# EAGLE board ROUTED_POUR (EAGLE 9.2.2)
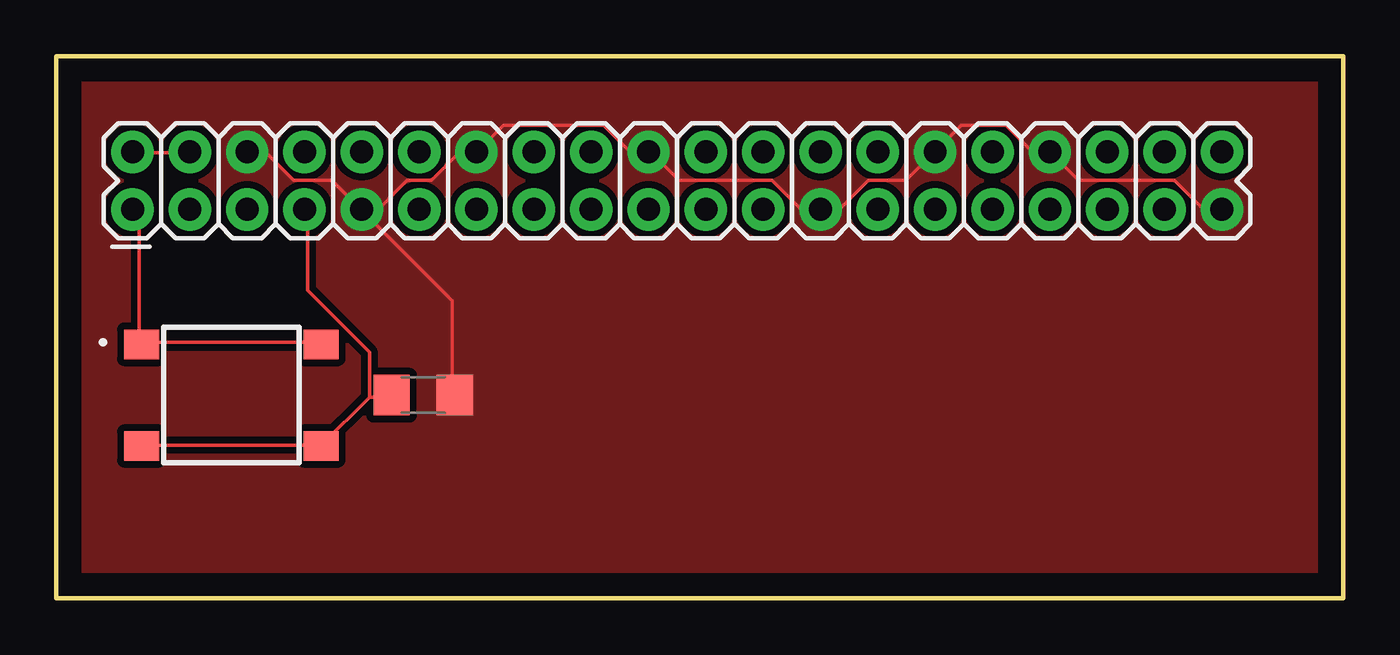
[diagram p0: board, top side]
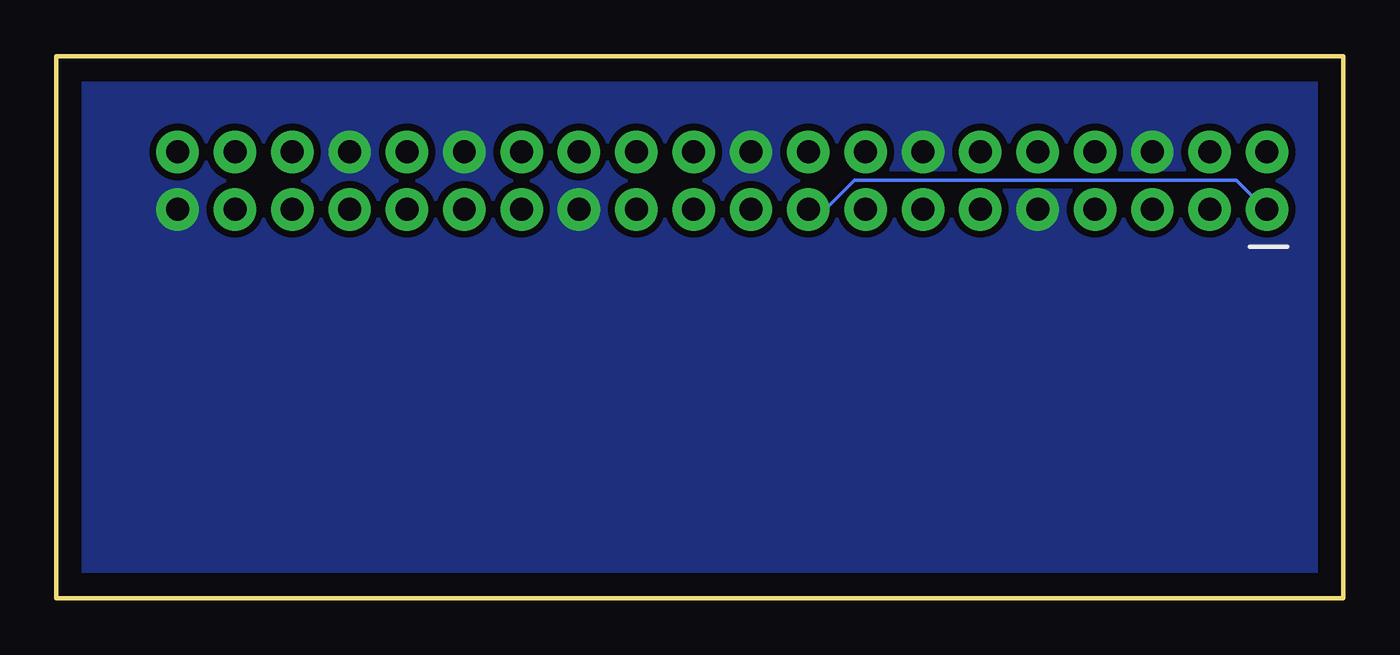
[diagram p1: board, bottom side, seen from below]

Size 57 x 24 mm. Coordinates in mm from the lower left corner, seen from the top.
Outline: 0,0 57,0 57,24 0,24 0,0
Copper layers (1*16): Top 0.035mm / dielectric 0.15mm / Bottom 0.035mm
Design rules "default": minimum track width 6mil, minimum drill 0.35mm, track to track 6mil, track to pad 6mil, pad to pad 6mil, via to via 6mil, smd to smd 6mil, copper to edge 40mil, drill to drill 6mil, minimum pad ring 10mil, minimum via ring 8mil, stop-mask expansion 4mil, vias tented up to drill 0mil, thermal gap 10mil

## Footprints (pad centres in the part's own frame; a part is rotated, then mirrored left to right if it is on the bottom)
CONNECTOR_RASPBERRYPI_SPARKFUN-CONNECTORS_2X20 = drill 1.016 pad 1.88: 1 -24.13,-1.27; 2 -24.13,1.27; 3 -21.59,-1.27; 4 -21.59,1.27; 5 -19.05,-1.27; 6 -19.05,1.27; 7 -16.51,-1.27; 8 -16.51,1.27; 9 -13.97,-1.27; 10 -13.97,1.27; 11 -11.43,-1.27; 12 -11.43,1.27; 13 -8.89,-1.27; 14 -8.89,1.27; 15 -6.35,-1.27; 16 -6.35,1.27; 17 -3.81,-1.27; 18 -3.81,1.27; 19 -1.27,-1.27; 20 -1.27,1.27; 21 1.27,-1.27; 22 1.27,1.27; 23 3.81,-1.27; 24 3.81,1.27; 25 6.35,-1.27; 26 6.35,1.27; 27 8.89,-1.27; 28 8.89,1.27; 29 11.43,-1.27; 30 11.43,1.27; 31 13.97,-1.27; 32 13.97,1.27; 33 16.51,-1.27; 34 16.51,1.27; 35 19.05,-1.27; 36 19.05,1.27; 37 21.59,-1.27; 38 21.59,1.27; 39 24.13,-1.27; 40 24.13,1.27
1206 = smd 1.6 x 1.8: 1 -1.4,0; 2 1.4,0
PTS645SL50SMTR92LFS_PTS645SMT = smd 1.55 x 1.3: 1 -3.975,2.25; 2 3.975,2.25; 3 -3.975,-2.25; 4 3.975,-2.25

## Placement (x,y rotation side)
J1_CONNECTOR  CONNECTOR_RASPBERRYPI_SPARKFUN-CONNECTORS_RASPBERRYPI-40-PIN-GPIO_PTH_NO_SHROUD  [CONNECTOR_RASPBERRYPI_SPARKFUN-CONNECTORS_2X20]  27.5,18.5 0 top
R1_MODULE_0  [1206]  16.25,9 0 top
S1_MODULE_0  PTS645SL50SMTR92LFS_PTS645SL50SMTR92LFS  [PTS645SL50SMTR92LFS_PTS645SMT]  7.75,9 0 top

## Library data of the parts
J1_CONNECTOR = connector_raspberrypi
R1_MODULE_0 = SparkFun-Resistors
S1_MODULE_0 = tactile_push_button_smd

## Nets
2: J1_CONNECTOR.3
3: J1_CONNECTOR.5
3.3V: J1_CONNECTOR.1 J1_CONNECTOR.17 S1_MODULE_0.1 S1_MODULE_0.2
4: J1_CONNECTOR.7 R1_MODULE_0.1 S1_MODULE_0.3 S1_MODULE_0.4
5: J1_CONNECTOR.29
5V: J1_CONNECTOR.2 J1_CONNECTOR.4
6: J1_CONNECTOR.31
8: J1_CONNECTOR.24
9: J1_CONNECTOR.21
10: J1_CONNECTOR.19
11: J1_CONNECTOR.23
12: J1_CONNECTOR.32
13: J1_CONNECTOR.33
14: J1_CONNECTOR.8
15: J1_CONNECTOR.10
16: J1_CONNECTOR.36
17: J1_CONNECTOR.11
18: J1_CONNECTOR.12
19: J1_CONNECTOR.35
20: J1_CONNECTOR.38
21: J1_CONNECTOR.40
22: J1_CONNECTOR.15
23: J1_CONNECTOR.16
24: J1_CONNECTOR.18
25: J1_CONNECTOR.22
26: J1_CONNECTOR.37
27: J1_CONNECTOR.13
GND: J1_CONNECTOR.6 J1_CONNECTOR.9 J1_CONNECTOR.14 J1_CONNECTOR.20 J1_CONNECTOR.25 J1_CONNECTOR.30 J1_CONNECTOR.34 J1_CONNECTOR.39 R1_MODULE_0.2

## Tracks (layer width: path | path; a pad name or v marks a point on that pad's centre or on a via)
3.3V
  Top 0.152: S1_MODULE_0.2 11.58,11.35 3.81,11.35 S1_MODULE_0.1 3.66,11.35 3.66,16.99 3.5,17.14 J1_CONNECTOR.1
  Bottom 0.152: J1_CONNECTOR.17 23.62,17.29 22.86,17.29 21.64,18.51 4.72,18.51 3.5,17.29 J1_CONNECTOR.1
4
  Top 0.152: J1_CONNECTOR.7 11.12,17.14 11.12,13.64 13.87,10.89 13.87,8.91 | 13.87,8.91 11.73,6.78 S1_MODULE_0.4 11.58,6.78 3.81,6.78 S1_MODULE_0.3 | 13.87,8.91 14.78,8.91 R1_MODULE_0.1
5V
  Top 0.152: J1_CONNECTOR.2 3.5,19.73 5.79,19.73 J1_CONNECTOR.4
GND
  Top 0.152: J1_CONNECTOR.9 13.41,17.29 12.19,18.51 10.52,18.51 9.3,19.73 8.53,19.73 J1_CONNECTOR.6 | J1_CONNECTOR.9 13.56,17.14 13.87,16.84 | 13.87,16.84 J1_CONNECTOR.9 | 13.87,16.84 15.54,18.51 16.61,18.51 17.83,19.73 18.59,19.73 J1_CONNECTOR.14 18.75,19.88 19.81,20.95 24.23,20.95 25.3,19.88 26.21,19.88 J1_CONNECTOR.20 26.36,19.73 27.58,18.51 31.7,18.51 32.92,17.29 33.83,17.29 J1_CONNECTOR.25 33.98,17.29 34.75,17.29 35.97,18.51 37.64,18.51 38.86,19.73 J1_CONNECTOR.30 39.01,19.88 40.08,20.95 42.06,20.95 43.13,19.88 43.89,19.88 J1_CONNECTOR.34 44.04,19.73 45.26,18.51 49.53,18.51 50.75,17.29 51.51,17.29 J1_CONNECTOR.39 | 13.87,16.84 17.53,13.18 17.53,9.06 R1_MODULE_0.2
  pour Bottom (isolate 0.305, no thermals): 57,0 0,0 0,24 57,24
  pour Top (isolate 0.305, no thermals): 57,0 0,0 0,24 57,24